# EAGLE board zx80 SD_12 (smd) build006.9(STM32) (EAGLE 9.6.2), part 1 of 2
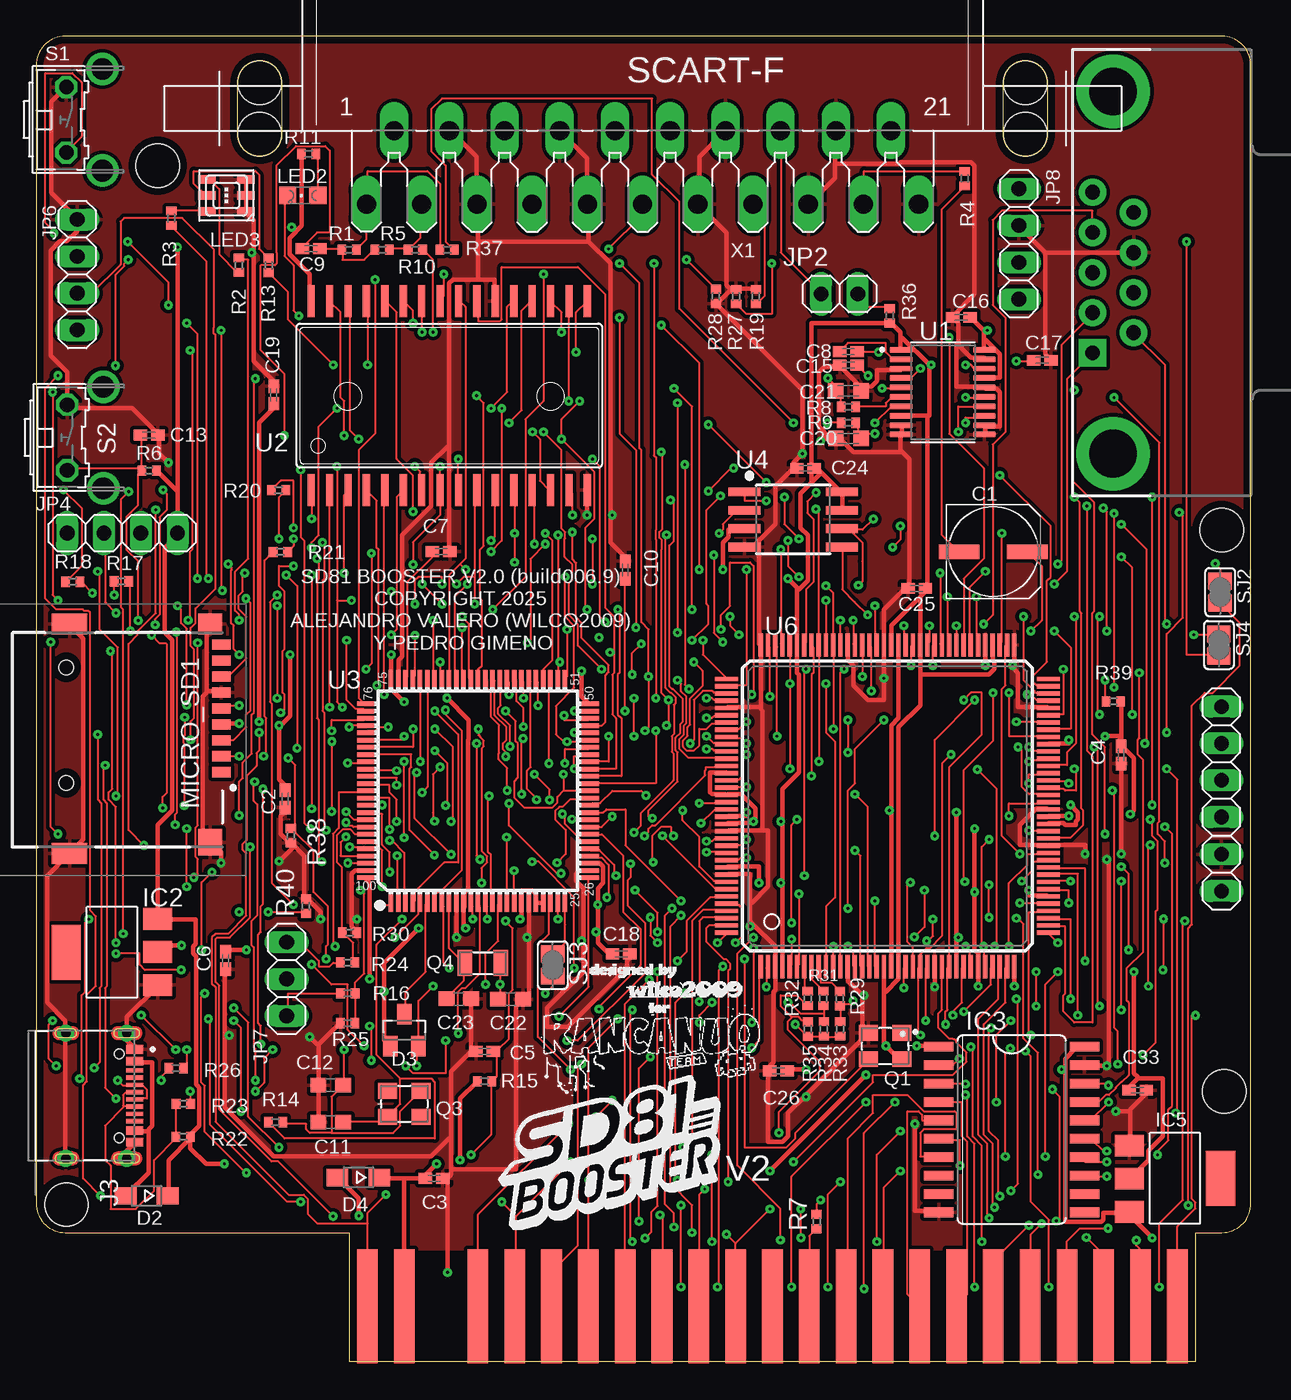
[diagram p0: board, top side]
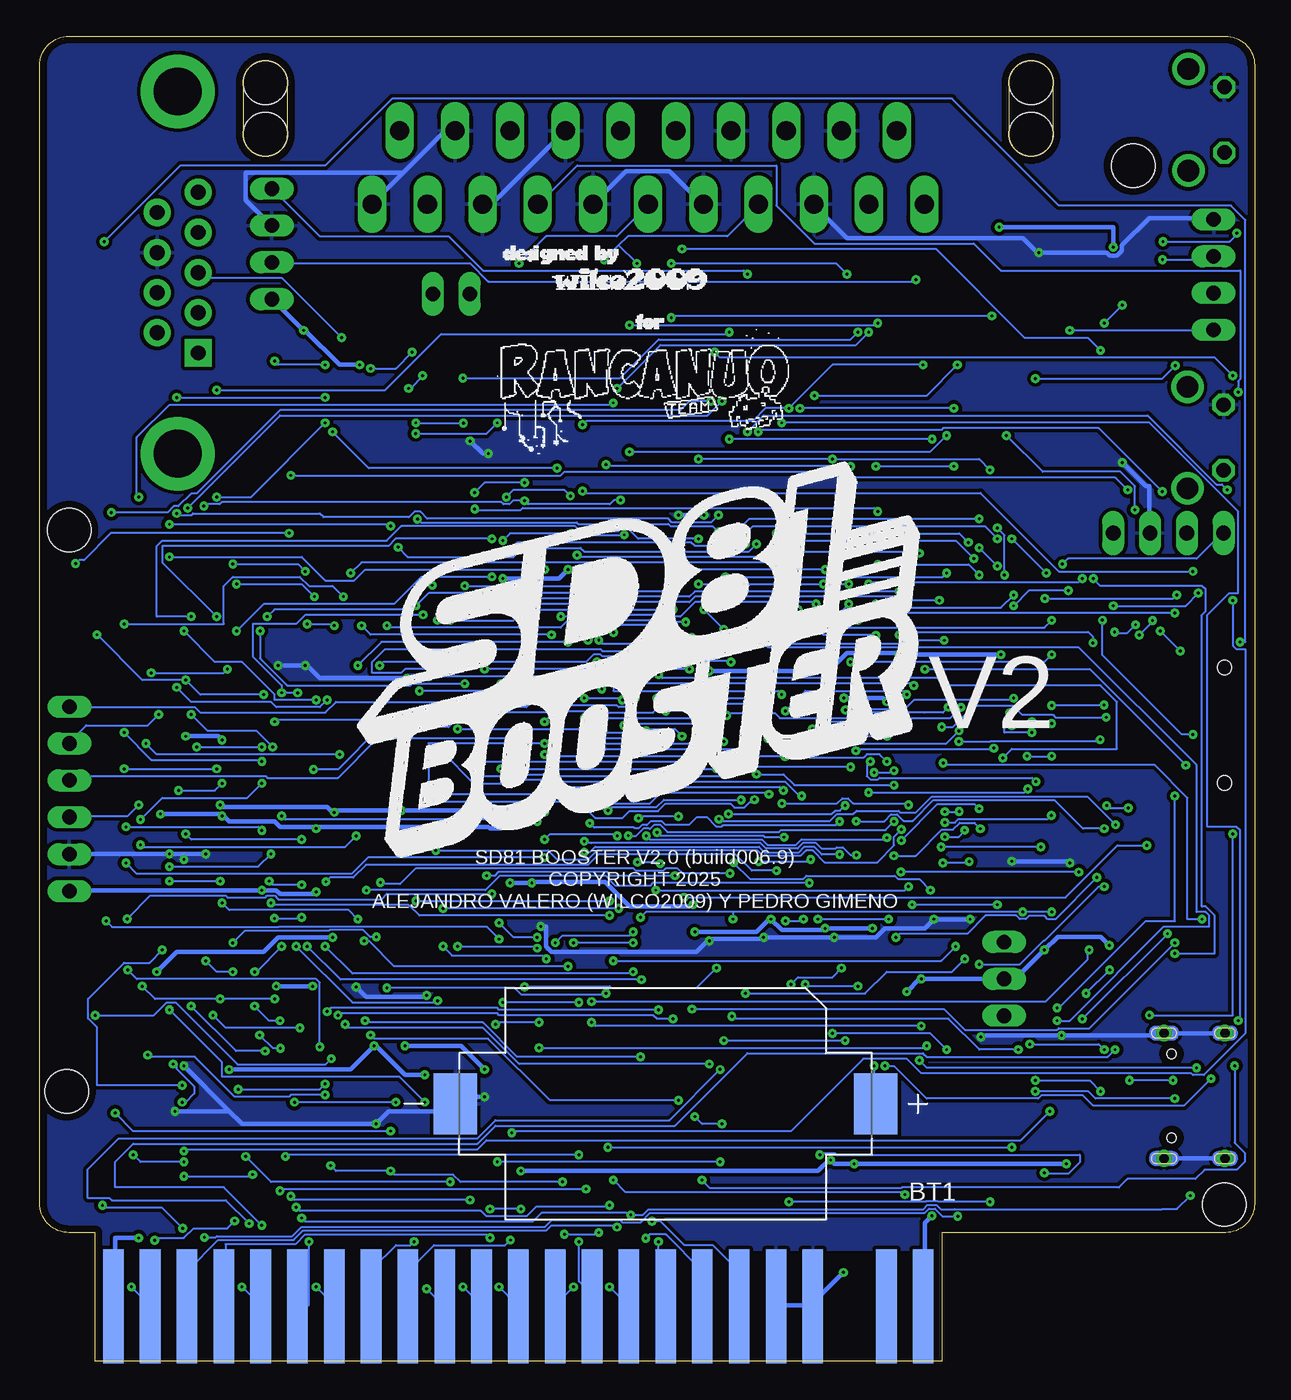
[diagram p1: board, bottom side, seen from below]

Size 83.82 x 91.44 mm. Coordinates in mm from the lower left corner, seen from the top.
Outline: 80.01,8.89 81.82,8.89 arc90 83.82,10.89 83.82,89.44 arc90 81.82,91.44 2,91.44 arc90 0,89.44 0,10.89 arc90 2,8.89 21.59,8.89 21.59,0 80.01,0 80.01,8.89
Copper layers (1*16): Top 0.035mm / dielectric 1.5mm / Bottom 0.035mm
Design rules "default *": minimum track width 5mil, minimum drill 0.2mm, track to track 5mil, track to pad 5mil, pad to pad 5mil, via to via 5mil, smd to smd 5mil, copper to edge 20mil, drill to drill 6mil, minimum pad ring 10mil, minimum via ring 8mil, stop-mask expansion 4mil, vias tented up to drill 999mil, thermal gap 10mil
Net classes: 1 VCC: width 0.3 mm; 2 3,3: width 0.3 mm
Holes 3 mm at 2.09,10.82 8.38,82.51 81.79,57.36 81.96,18.64

## Footprints (pad centres in the part's own frame; a part is rotated, then mirrored left to right if it is on the bottom)
EDGEPIN = smd 1.422 x 7.874: 1 0,0
BAT_CR2032-BS-6-1 = smd 3 x 4.2: N 14.5,0; P -14.5,0
UD-6,3X7,7_NICHICON = smd 2.8 x 1: + 2.35,0; - -2.35,0
C0402K = smd 0.925 x 0.74: 1 -0.6,0; 2 0.6,0
C0603 = smd 1.1 x 1: 1 -0.85,0; 2 0.85,0
C0603K = smd 1.05 x 1.08: 1 -0.875,0; 2 0.875,0
SOD323-W = smd 1.5 x 1.2: A 1.45,0; C -1.45,0
SOT23 = smd 1 x 1.4: 1 -0.95,-1.1; 2 0.95,-1.1; 3 0,1.1
SOT223 = smd 1.499 x 2.007: 1 -2.261,-3.15; 2 0.025,-3.15; 3 2.311,-3.15 | smd 3.81 x 2.007: 4 0,3.15
SO20W = smd 0.66 x 2.032: 1 -5.715,-5.029; 2 -4.445,-5.029; 3 -3.175,-5.029; 4 -1.905,-5.029; 5 -0.635,-5.029; 6 0.635,-5.029; 7 1.905,-5.029; 8 3.175,-5.029; 9 4.445,-5.029; 10 5.715,-5.029; 11 5.715,5.029; 12 4.445,5.029; 13 3.175,5.029; 14 1.905,5.029; 15 0.635,5.029; 16 -0.635,5.029; 17 -1.905,5.029; 18 -3.175,5.029; 19 -4.445,5.029; 20 -5.715,5.029
DB9_MALE = drill 1.016 pad 1.88 square: 1 5.54,-1.42 | drill 1.016 pad 1.88: 2 2.77,-1.42; 3 0,-1.42; 4 -2.77,-1.42; 5 -5.54,-1.42; 6 4.15,1.42; 7 1.38,1.42; 8 -1.38,1.42; 9 -4.15,1.42 | drill 3.302 pad 5.08: G1 -12.5,0; G2 12.5,0
SHOUHAN_TYPE-C_16PIN_2MD__073_ = smd 0.6 x 1.14: A1_B12 -3.2,3.675; A4_B9 -2.4,3.675; B1_A12 3.2,3.675; B4_A9 2.4,3.675 | smd 0.3 x 1.14: A5 -1.25,3.675; A6 -0.25,3.675; A7 0.25,3.675; A8 1.25,3.675; B5 1.75,3.675; B6 0.75,3.675; B7 -0.75,3.675; B8 -1.75,3.675 | drill 0.65 pad 0.95: SH1 -4.325,3.125; SH2 4.325,3.125; SH3 -4.325,-1.075; SH4 4.325,-1.075 | hole 0.65: -2.89,2.605; 2.89,2.605
1X02 = drill 1.016 long: 1 -1.27,0; 2 1.27,0
1X04 = drill 1.016 long: 1 -3.81,0; 2 -1.27,0; 3 1.27,0; 4 3.81,0
1X03 = drill 1.016 long: 1 -2.54,0; 2 0,0; 3 2.54,0
CHIPLED_0805 = smd 1.2 x 1.2: A 0,-1.05; C 0,1.05
3535-PLCC6 = smd 1.2 x 0.6: P1 1.35,-1.1; P2 1.35,0; P3 1.35,1.1; P4 -1.35,1.1; P5 -1.35,0; P6 -1.35,-1.1
TF-01A = smd 0.7 x 1.3: 1 2.23,7.174; 2 1.13,7.174; 3 0.03,7.174; 4 -1.07,7.174; 5 -2.17,7.174; 6 -3.27,7.174; 7 -4.37,7.174; 8 -5.47,7.174; CD1 -6.57,7.174 | smd 1.448 x 1.651: MP1 -7.989,6.4 | smd 1.448 x 2.438: MP2 -7.989,-3.3; MP3 7.836,-3.3 | smd 1.854 x 1.651: MP4 7.061,6.4 | hole 1: -5.004,-3.531; 2.972,-3.531
3.2X2.5_KXO-V96 = smd 1.3 x 1.1: 1 -1.15,-0.9; 2 1.15,-0.9; 3 1.15,0.9; 4 -1.15,0.9
3.2X2.5_KX-7 = smd 1.3 x 1.1: 1 -1.15,-0.9; 2 1.15,-0.9; 3 1.15,0.9; 4 -1.15,0.9
3.2X1.5 = smd 1 x 1.8: 1 -1.25,0; 2 1.25,0
R0402 = smd 0.6 x 0.7: 1 -0.5,0; 2 0.5,0
B3F-31XX = drill 1.016 octagon: 1 -2.261,-1.245; 2 2.261,-1.245 | drill 1.499 pad 2.159: 3 -3.505,1.245; 4 3.505,1.245
SJ = smd 1.168 x 1.6: 1 -0.762,0; 2 0.762,0
SOP65P640X120-20N = smd 1.57 x 0.41: 1 -2.87,2.925; 2 -2.87,2.275; 3 -2.87,1.625; 4 -2.87,0.975; 5 -2.87,0.325; 6 -2.87,-0.325; 7 -2.87,-0.975; 8 -2.87,-1.625; 9 -2.87,-2.275; 10 -2.87,-2.925; 11 2.87,-2.925; 12 2.87,-2.275; 13 2.87,-1.625; 14 2.87,-0.975; 15 2.87,-0.325; 16 2.87,0.325; 17 2.87,0.975; 18 2.87,1.625; 19 2.87,2.275; 20 2.87,2.925
SOP32-5 = smd 2.2 x 0.5: 1 -6.516,9.525; 2 -6.516,8.255; 3 -6.516,6.985; 4 -6.516,5.715; 5 -6.516,4.445; 6 -6.516,3.175; 7 -6.516,1.905; 8 -6.516,0.635; 9 -6.516,-0.635; 10 -6.516,-1.905; 11 -6.516,-3.175; 12 -6.516,-4.445; 13 -6.516,-5.715; 14 -6.516,-6.985; 15 -6.516,-8.255; 16 -6.516,-9.525; 17 6.516,-9.525; 18 6.516,-8.255; 19 6.516,-6.985; 20 6.516,-5.715; 21 6.516,-4.445; 22 6.516,-3.175; 23 6.516,-1.905; 24 6.516,-0.635; 25 6.516,0.635; 26 6.516,1.905; 27 6.516,3.175; 28 6.516,4.445; 29 6.516,5.715; 30 6.516,6.985; 31 6.516,8.255; 32 6.516,9.525
LQFP100-0.5-13.8X13.8MM = smd 1.2 x 0.32: 1 -7.75,6; 2 -7.75,5.5; 3 -7.75,5; 4 -7.75,4.5; 5 -7.75,4; 6 -7.75,3.5; 7 -7.75,3; 8 -7.75,2.5; 9 -7.75,2; 10 -7.75,1.5; 11 -7.75,1; 12 -7.75,0.5; 13 -7.75,0; 14 -7.75,-0.5; 15 -7.75,-1; 16 -7.75,-1.5; 17 -7.75,-2; 18 -7.75,-2.5; 19 -7.75,-3; 20 -7.75,-3.5; 21 -7.75,-4; 22 -7.75,-4.5; 23 -7.75,-5; 24 -7.75,-5.5; 25 -7.75,-6; 51 7.75,-6; 52 7.75,-5.5; 53 7.75,-5; 54 7.75,-4.5; 55 7.75,-4; 56 7.75,-3.5; 57 7.75,-3; 58 7.75,-2.5; 59 7.75,-2; 60 7.75,-1.5; 61 7.75,-1; 62 7.75,-0.5; 63 7.75,0; 64 7.75,0.5; 65 7.75,1; 66 7.75,1.5; 67 7.75,2; 68 7.75,2.5; 69 7.75,3; 70 7.75,3.5; 71 7.75,4; 72 7.75,4.5; 73 7.75,5; 74 7.75,5.5; 75 7.75,6 | smd 0.32 x 1.2: 26 -6,-7.75; 27 -5.5,-7.75; 28 -5,-7.75; 29 -4.5,-7.75; 30 -4,-7.75; 31 -3.5,-7.75; 32 -3,-7.75; 33 -2.5,-7.75; 34 -2,-7.75; 35 -1.5,-7.75; 36 -1,-7.75; 37 -0.5,-7.75; 38 0,-7.75; 39 0.5,-7.75; 40 1,-7.75; 41 1.5,-7.75; 42 2,-7.75; 43 2.5,-7.75; 44 3,-7.75; 45 3.5,-7.75; 46 4,-7.75; 47 4.5,-7.75; 48 5,-7.75; 49 5.5,-7.75; 50 6,-7.75; 76 6,7.75; 77 5.5,7.75; 78 5,7.75; 79 4.5,7.75; 80 4,7.75; 81 3.5,7.75; 82 3,7.75; 83 2.5,7.75; 84 2,7.75; 85 1.5,7.75; 86 1,7.75; 87 0.5,7.75; 88 0,7.75; 89 -0.5,7.75; 90 -1,7.75; 91 -1.5,7.75; 92 -2,7.75; 93 -2.5,7.75; 94 -3,7.75; 95 -3.5,7.75; 96 -4,7.75; 97 -4.5,7.75; 98 -5,7.75; 99 -5.5,7.75; 100 -6,7.75
SO08-EIAJ = smd 0.61 x 2.21: 1 -1.905,-3.378; 2 -0.635,-3.378; 3 0.635,-3.378; 4 1.905,-3.378; 5 1.905,3.353; 6 0.635,3.353; 7 -0.635,3.353; 8 -1.905,3.353
TQ144 = smd 1.6 x 0.3: P1 -11.1,8.75; P2 -11.1,8.25; P3 -11.1,7.75; P4 -11.1,7.25; P5 -11.1,6.75; P6 -11.1,6.25; P7 -11.1,5.75; P8 -11.1,5.25; P9 -11.1,4.75; P10 -11.1,4.25; P11 -11.1,3.75; P12 -11.1,3.25; P13 -11.1,2.75; P14 -11.1,2.25; P15 -11.1,1.75; P16 -11.1,1.25; P17 -11.1,0.75; P18 -11.1,0.25; P19 -11.1,-0.25; P20 -11.1,-0.75; P21 -11.1,-1.25; P22 -11.1,-1.75; P23 -11.1,-2.25; P24 -11.1,-2.75; P25 -11.1,-3.25; P26 -11.1,-3.75; P27 -11.1,-4.25; P28 -11.1,-4.75; P29 -11.1,-5.25; P30 -11.1,-5.75; P31 -11.1,-6.25; P32 -11.1,-6.75; P33 -11.1,-7.25; P34 -11.1,-7.75; P35 -11.1,-8.25; P36 -11.1,-8.75; P73 11.1,-8.75; P74 11.1,-8.25; P75 11.1,-7.75; P76 11.1,-7.25; P77 11.1,-6.75; P78 11.1,-6.25; P79 11.1,-5.75; P80 11.1,-5.25; P81 11.1,-4.75; P82 11.1,-4.25; P83 11.1,-3.75; P84 11.1,-3.25; P85 11.1,-2.75; P86 11.1,-2.25; P87 11.1,-1.75; P88 11.1,-1.25; P89 11.1,-0.75; P90 11.1,-0.25; P91 11.1,0.25; P92 11.1,0.75; P93 11.1,1.25; P94 11.1,1.75; P95 11.1,2.25; P96 11.1,2.75; P97 11.1,3.25; P98 11.1,3.75; P99 11.1,4.25; P100 11.1,4.75; P101 11.1,5.25; P102 11.1,5.75; P103 11.1,6.25; P104 11.1,6.75; P105 11.1,7.25; P106 11.1,7.75; P107 11.1,8.25; P108 11.1,8.75 | smd 0.3 x 1.6: P37 -8.75,-11.1; P38 -8.25,-11.1; P39 -7.75,-11.1; P40 -7.25,-11.1; P41 -6.75,-11.1; P42 -6.25,-11.1; P43 -5.75,-11.1; P44 -5.25,-11.1; P45 -4.75,-11.1; P46 -4.25,-11.1; P47 -3.75,-11.1; P48 -3.25,-11.1; P49 -2.75,-11.1; P50 -2.25,-11.1; P51 -1.75,-11.1; P52 -1.25,-11.1; P53 -0.75,-11.1; P54 -0.25,-11.1; P55 0.25,-11.1; P56 0.75,-11.1; P57 1.25,-11.1; P58 1.75,-11.1; P59 2.25,-11.1; P60 2.75,-11.1; P61 3.25,-11.1; P62 3.75,-11.1; P63 4.25,-11.1; P64 4.75,-11.1; P65 5.25,-11.1; P66 5.75,-11.1; P67 6.25,-11.1; P68 6.75,-11.1; P69 7.25,-11.1; P70 7.75,-11.1; P71 8.25,-11.1; P72 8.75,-11.1; P109 8.75,11.1; P110 8.25,11.1; P111 7.75,11.1; P112 7.25,11.1; P113 6.75,11.1; P114 6.25,11.1; P115 5.75,11.1; P116 5.25,11.1; P117 4.75,11.1; P118 4.25,11.1; P119 3.75,11.1; P120 3.25,11.1; P121 2.75,11.1; P122 2.25,11.1; P123 1.75,11.1; P124 1.25,11.1; P125 0.75,11.1; P126 0.25,11.1; P127 -0.25,11.1; P128 -0.75,11.1; P129 -1.25,11.1; P130 -1.75,11.1; P131 -2.25,11.1; P132 -2.75,11.1; P133 -3.25,11.1; P134 -3.75,11.1; P135 -4.25,11.1; P136 -4.75,11.1; P137 -5.25,11.1; P138 -5.75,11.1; P139 -6.25,11.1; P140 -6.75,11.1; P141 -7.25,11.1; P142 -7.75,11.1; P143 -8.25,11.1; P144 -8.75,11.1
SCART-F = drill 1.321 long: 1 19.05,5.08; 2 17.145,0; 3 15.24,5.08; 4 13.335,0; 5 11.43,5.08; 6 9.525,0; 7 7.62,5.08; 8 5.715,0; 9 3.81,5.08; 10 1.905,0; 11 0,5.08; 12 -1.905,0; 13 -3.81,5.08; 14 -5.715,0; 15 -7.62,5.08; 16 -9.525,0; 17 -11.43,5.08; 18 -13.335,0; 19 -15.24,5.08; 20 -17.145,0; 21 -19.05,5.08 | hole 3.023: 26.416,0.254; 26.416,-3.302; -26.416,0.254; -26.416,-3.302

## Placement (x,y rotation side)
1A  D7  [EDGEPIN]  22.86,3.81 0 top
1B  VCC  [EDGEPIN]  22.86,3.81 180 bottom
2A  /RAMCS  [EDGEPIN]  25.4,3.81 0 top
2B  9V  [EDGEPIN]  25.4,3.81 180 bottom
4A  D0  [EDGEPIN]  30.48,3.81 0 top
4B  GND  [EDGEPIN]  30.48,3.81 180 bottom
5A  D1  [EDGEPIN]  33.02,3.81 0 top
5B  GND  [EDGEPIN]  33.02,3.81 180 bottom
6A  D2  [EDGEPIN]  35.56,3.81 0 top
6B  /CLOCK  [EDGEPIN]  35.56,3.81 180 bottom
7A  D6  [EDGEPIN]  38.1,3.81 0 top
7B  A0  [EDGEPIN]  38.1,3.81 180 bottom
8A  D5  [EDGEPIN]  40.64,3.81 0 top
8B  A1  [EDGEPIN]  40.64,3.81 180 bottom
9A  D3  [EDGEPIN]  43.18,3.81 0 top
9B  A2  [EDGEPIN]  43.18,3.81 180 bottom
10A  D4  [EDGEPIN]  45.72,3.81 0 top
10B  A3  [EDGEPIN]  45.72,3.81 180 bottom
11A  A6  [EDGEPIN]  48.26,3.81 0 top
11B  A15  [EDGEPIN]  48.26,3.81 180 bottom
12A  /NMI  [EDGEPIN]  50.8,3.81 0 top
12B  A14  [EDGEPIN]  50.8,3.81 180 bottom
13A  /HALT  [EDGEPIN]  53.34,3.81 0 top
13B  A13  [EDGEPIN]  53.34,3.81 180 bottom
14A  /MREQ  [EDGEPIN]  55.88,3.81 0 top
14B  A12  [EDGEPIN]  55.88,3.81 180 bottom
15A  /IORQ  [EDGEPIN]  58.42,3.81 0 top
15B  A11  [EDGEPIN]  58.42,3.81 180 bottom
16A  /RD  [EDGEPIN]  60.96,3.81 0 top
16B  A10  [EDGEPIN]  60.96,3.81 180 bottom
17A  /WR  [EDGEPIN]  63.5,3.81 0 top
17B  A9  [EDGEPIN]  63.5,3.81 180 bottom
18A  /BUSAK  [EDGEPIN]  66.04,3.81 0 top
18B  A8  [EDGEPIN]  66.04,3.81 180 bottom
19A  /WAIT  [EDGEPIN]  68.58,3.81 0 top
19B  A7  [EDGEPIN]  68.58,3.81 180 bottom
20A  /BUSRQ  [EDGEPIN]  71.12,3.81 0 top
20B  A6  [EDGEPIN]  71.12,3.81 180 bottom
21A  /RESET  [EDGEPIN]  73.66,3.81 0 top
21B  A5  [EDGEPIN]  73.66,3.81 180 bottom
22A  /M1  [EDGEPIN]  76.2,3.81 0 top
22B  A4  [EDGEPIN]  76.2,3.81 180 bottom
23A  /RFSH  [EDGEPIN]  78.74,3.81 0 top
23B  /ROMCS  [EDGEPIN]  78.74,3.81 180 bottom
BT1  CR2032-BS-6-1  [BAT_CR2032-BS-6-1]  40.64,17.78 180 bottom
C1  220uF  [UD-6,3X7,7_NICHICON]  66.04,55.88 0 top
C2  100nF  [C0402K]  17.17,38.81 270 top
C3  10uF  [C0402K]  27.45,12.63 0 top
C4  100nF  [C0402K]  74.85,41.85 90 top
C5  10uf  [C0402K]  30.94,21.39 0 top
C6  10uF  [C0402K]  13.07,27.66 270 top
C7  10uF  [C0402K]  27.94,55.88 0 top
C8  2.2uF  [C0402K]  56.04,69.67 180 top
C9  10uF  [C0402K]  18.96,76.79 180 top
C10  10uF  [C0402K]  40.64,54.61 90 top
C11  22pF  [C0603]  20.32,16.51 0 top
C12  22pF  [C0603]  20.32,19.05 0 top
C13  10uf  [C0402K]  7.79,63.92 180 top
C15  2.2uF  [C0402K]  56.04,68.74 0 top
C16  100nF  [C0402K]  63.83,72.05 0 top
C17  100nF  [C0402K]  69.42,69.08 180 top
C18  100nF  [C0402K]  40.37,28.11 0 top
C19  100nF  [C0402K]  16.39,66.69 90 top
C20  2.2nf  [C0603K]  56.05,63.68 0 top
C21  2.2nf  [C0603K]  56.04,66.97 180 top
C22  22pF  [C0603]  32.73,25 180 top
C23  22pF  [C0603]  29.16,25.02 180 top
C24  0.1uF  [C0402K]  53.09,61.63 180 top
C25  0.1uF  [C0402K]  60.76,53.34 180 top
C26  100nF  [C0402K]  51.22,20.05 180 top
C33  10uF  [C0402K]  76,18.71 0 top
D2  1n5819  [SOD323-W]  7.62,11.43 180 top
D3  BAT54C  [SOT23]  25.4,22.86 0 top
D4  1n5819  [SOD323-W]  22.23,12.7 180 top
IC2  REG1117  [SOT223]  5.23,28.23 90 top
IC3  74LS245DW  [SO20W]  67.3,16 270 top
IC5  1.2V  [SOT223]  78.57,12.64 270 top
J2  JOYSTICK  [DB9_MALE]  74.31,75.13 270 top
J3  TYPE-C_16PIN_2MD__073_  [SHOUHAN_TYPE-C_16PIN_2MD__073_]  3.12,18.33 270 top
JP2  RGB_ON  [1X02]  55.43,73.67 0 top
JP3  JTAG  [1X04]  81.78,41.37 90 top
JP4  SERIAL  [1X04]  5.94,57.16 180 top
JP5  VREF  [1X02]  81.78,33.73 90 top
JP6  PS2  [1X04]  2.83,74.98 270 top
JP7  BOOT  [1X03]  17.28,26.39 270 top
JP8  ST-LINK-V2  [1X04]  67.81,77.11 270 top
LED2  SD  [CHIPLED_0805]  18.4,80.45 90 top
LED3  STATUS  [3535-PLCC6]  13.13,80.45 0 top
MICRO_SD1  TF-01A  [TF-01A]  5.6,42.89 270 top
Q1  100MHz  [3.2X2.5_KXO-V96]  58.58,21.76 180 top
Q3  8MHz  [3.2X2.5_KX-7]  25.4,17.78 0 top
Q4  32767Hz  [3.2X1.5]  30.82,27.49 0 top
R1  1K  [R0402]  21.58,76.7 180 top
R2  150  [R0402]  13.98,75.64 270 top
R3  68  [R0402]  9.33,78.89 90 top
R4  75R  [R0402]  64.07,81.62 270 top
R5  1K  [R0402]  23.87,76.7 180 top
R6  10K  [R0402]  7.79,61.46 0 top
R7  33  [R0402]  53.84,9.65 90 top
R8  470  [R0402]  56.04,65.86 0 top
R9  470  [R0402]  56.04,64.76 180 top
R10  1K  [R0402]  26.16,76.7 180 top
R11  680  [R0402]  18.8,83.32 0 top
R13  150  [R0402]  16.05,75.63 90 top
R14  1M  [R0402]  16.51,16.51 0 top
R15  10K  [R0402]  30.94,19.34 180 top
R16  510  [R0402]  21.5,25.4 0 top
R17  3k3  [R0402]  5.87,53.83 180 top
R18  3k3  [R0402]  2.52,53.8 0 top
R19  130  [R0402]  49.66,73.47 90 top
R20  3k3  [R0402]  16.73,60.12 0 top
R21  3k3  [R0402]  16.85,55.86 180 top
R22  1K5  [R0402]  10.14,15.5 0 top
R23  22R  [R0402]  10.16,17.78 0 top
R24  510  [R0402]  21.49,27.52 180 top
R25  10K  [R0402]  21.49,23.34 0 top
R26  22R  [R0402]  9.65,20.24 0 top
R27  130  [R0402]  48.3,73.47 90 top
R28  130  [R0402]  46.9,73.48 270 top
R29  270  [R0402]  55.45,25.03 270 top
R30  10K  [R0402]  21.63,29.59 180 top
R31  270  [R0402]  54.32,25.04 270 top
R32  270  [R0402]  53.23,25.04 270 top
R33  470  [R0402]  55.47,22.94 90 top
R34  470  [R0402]  54.34,22.94 90 top
R35  470  [R0402]  53.24,22.92 90 top
R36  100R  [R0402]  58.89,72.15 270 top
R37  1K  [R0402]  28.36,76.7 180 top
R38  1K  [R0402]  17.57,36.28 270 top
R39  4K7  [R0402]  74.33,45.55 180 top
R40  1K  [R0402]  18.62,31.41 90 top
S1  RESET  [B3F-31XX]  3.32,85.67 270 top
S2  QSILVA  [B3F-31XX]  3.38,63.75 270 top
SJ2  [SJ]  81.69,53.08 270 top
SJ3  [SJ]  35.64,27.35 270 top
SJ4  [SJ]  81.61,49.44 270 top
U1  PCM5100PW  [SOP65P640X120-20N]  62.56,66.88 0 top
U2  AS6C4008  [SOP32-5]  28.5,66.65 90 top
U3  MCU-STM32F407VET6  [LQFP100-0.5-13.8X13.8MM]  30.48,39.37 90 top
U4  W25Q128JVSIQ  [SO08-EIAJ]  52.23,58.1 270 top
U6  XC6SLX9-2TQG144C  [TQ144]  58.74,38.34 90 top
X1  SCART-F  [SCART-F]  41.84,84.93 180 top

## Library data of the parts
1A 1B 2A 2B 4A 4B 5A 5B 6A 6B 7A 7B 8A 8B 9A 9B 10A 10B 11A 11B 12A 12B 13A 13B 14A 14B 15A 15B 16A 16B 17A 17B 18A 18B 19A 19B 20A 20B 21A 21B 22A 22B 23A 23B = wirepad
BT1 = CR2032-BS-6-1; AVAILABILITY: Not in stock; CHECK_PRICES: https://www.snapeda.com/parts/CR2032-BS-6-1/Shenzhen+Huacan+Tianlu+Electronics+Co.%252C+Ltd./view-part/?ref=eda; DESCRIPTION: Battery base CR2032 SMD Battery Connectors ROHS; MF: Shenzhen Q&J Electronics Co. Ltd; MP: CR2032-BS-6-1; PACKAGE: Package; PRICE: None; SNAPEDA_LINK: https://www.snapeda.com/parts/CR2032-BS-6-1/Shenzhen+Huacan+Tianlu+Electronics+Co.%252C+Ltd./view-part/?ref=snap
C1-C13 C15-C26 C33 = rcl; SPICEPREFIX: C
D2-D4 = diode
IC2 IC5 = burr-brown; MPN: REG1117; OC_FARNELL: 1097566; OC_NEWARK: 14P6981
IC3 = 74xx-eu
J2 = SparkFun-Connectors; PROD_ID: CONN-09904
J3 = TYPE-C_16PIN_2MD__073_; AVAILABILITY: Not in stock; CHECK_PRICES: https://www.snapeda.com/parts/TYPE-C%2016PIN%202MD%20(073)/Shouhan/view-part/?ref=eda; DESCRIPTION: DC-5V 5A Type C USB; MF: Shouhan; MP: TYPE-C 16PIN 2MD (073); PACKAGE: Package; PRICE: None; SNAPEDA_LINK: https://www.snapeda.com/parts/TYPE-C%2016PIN%202MD%20(073)/Shouhan/view-part/?ref=snap
JP2-JP8 = pinhead
LED2 LED3 = led
MICRO_SD1 = TF-01A; AVAILABILITY: Not in stock; CHECK_PRICES: https://www.snapeda.com/parts/TF-01A/HRO+Electronics+Co.%252C+Ltd./view-part/?ref=eda; DESCRIPTION: Standard Card Edge Connectors; MF: HRO Electronics Co., Ltd.; MP: TF-01A; PACKAGE: Package; PRICE: None; SNAPEDA_LINK: https://www.snapeda.com/parts/TF-01A/HRO+Electronics+Co.%252C+Ltd./view-part/?ref=snap
Q1 Q3 Q4 = crystal-geyer_V1_0
R1-R11 R13-R40 = rcl; SPICEPREFIX: R
S1 S2 = switch-omron; MPN: B3F-3100; OC_FARNELL: 959704; OC_NEWARK: 36M3582
SJ2-SJ4 = jumper
U1 = PCM5100PW; AVAILABILITY: In Stock; CHECK_PRICES: https://www.snapeda.com/parts/PCM5100PW/Texas+Instruments/view-part/?ref=eda; DESCRIPTION: 100dB Stereo DAC with 2VRMS output and Integrated Audio PLL 20-TSSOP -25 to 85; MF: Texas Instruments; MP: PCM5100PW; PACKAGE: TSSOP-20 Texas Instruments; PRICE: None; SNAPEDA_LINK: https://www.snapeda.com/parts/PCM5100PW/Texas+Instruments/view-part/?ref=snap
U2 = AS6C4008-55SIN
U3 = MCU-STM32F407VET6_LQFP100_; AVAILABILITY: In Stock; CHECK_PRICES: https://www.snapeda.com/parts/STM32F407VET6/STMicroelectronics/view-part/?ref=eda; DESCRIPTION: ARM® Cortex®-M4 STM32F4 Microcontroller IC 32-Bit Single-Core 168MHz 512KB (512K x 8) FLASH 100-LQFP (14x14); MF: STMicroelectronics; MP: STM32F407VET6; PACKAGE: LQFP-100 STMicroelectronics; PRICE: None; SNAPEDA_LINK: https://www.snapeda.com/parts/STM32F407VET6/STMicroelectronics/view-part/?ref=snap
U4 = SparkFun-IC-Memory; PROD_ID: IC-09109; VALUE: 25F32006WSOI
U6 = XC6SLX9-2TQG144C; AVAILABILITY: In Stock; CHECK_PRICES: https://www.snapeda.com/parts/XC6SLX9-2TQG144C/Xilinx/view-part/?ref=eda; DESCRIPTION: Spartan®-6 LX Field Programmable Gate Array (FPGA) IC 102 589824 9152 144-LQFP; MF: Xilinx Inc.; MP: XC6SLX9-2TQG144C; PACKAGE: TQFP-144 Xilinx; PRICE: None; SNAPEDA_LINK: https://www.snapeda.com/parts/XC6SLX9-2TQG144C/Xilinx/view-part/?ref=snap
X1 = con-hirschmann; OC_FARNELL: unknown; OC_NEWARK: unknown

## Nets
1V2 [VCC]: C33.1 IC5.2 U6.P19 U6.P28 U6.P52 U6.P89 U6.P128
3V3 [VCC]: C2.1 C4.2 C6.1 C16.2 C18.1 C19.1 C24.1 C25.1 C26.1 D3.1 IC2.2 JP5.1 JP7.2 JP8.4 MICRO_SD1.4 Q1.4 R36.2 R39.1 U1.1 U1.8 U1.17 U1.20 U3.11 U3.19 U3.21 U3.22 U3.28 U3.50 U3.75 U3.100 U4.3 U4.7 U4.8 U6.P4 U6.P18 U6.P20 U6.P31 U6.P36 U6.P42 U6.P53 U6.P63 U6.P76 U6.P86 U6.P90 U6.P103 U6.P122 U6.P125 U6.P129 U6.P135
9V [VCC]: 2B.1
!RESET: C5.2 R15.1 S1.2 U3.14
/BUSAK: 18A.1 SJ4.2
/BUSRQ: 20A.1 SJ2.2
/BUSRQ': SJ2.1 U6.P75
/CLOCK: 6B.1 U6.P24
/HALT: R7.2 U6.P45
/HALT': 13A.1 R7.1
/IORQ: IC3.14 U6.P51
/IORQ_5: 15A.1 IC3.6 U6.P143
/M1: IC3.17 U6.P67
/M1_5: 22A.1 IC3.3
/MEM_OE: U2.24 U3.67 U6.P92
/MREQ: IC3.13 U6.P47
/MREQ_5: 14A.1 IC3.7
/NMI: 12A.1
/OE_OL: U3.77 U6.P12
/RD: IC3.15 U6.P105
/RD_5: 16A.1 IC3.5
/RESET: 21A.1 U3.96
/RESET_FPGA: U3.95 U6.P140
/RFSH: IC3.18 U6.P74
/RFSH_5: 23A.1 IC3.2
/WAIT: 19A.1 U3.23
/WR: IC3.16 U6.P58
/WR': U2.29 U3.26 U6.P102
/WR_5: 17A.1 IC3.4
A0: 7B.1 U6.P30
A0': U2.12 U3.97 U6.P83
A1: 8B.1 U6.P33
A1': U2.11 U3.98 U6.P84
A2: 9B.1 U6.P35
A2': U2.10 U3.1 U6.P85
A3: 10B.1 U6.P40
A3': U2.9 U3.2 U6.P88
A4: 22B.1 U6.P5
A4': U2.8 U3.3 U6.P93
A5: 21B.1 U6.P66
A5': U2.7 U3.4 U6.P95
A6: 11A.1 20B.1 U6.P41
A6': U2.6 U3.5 U6.P99
A7: 19B.1 U6.P62
A7': U2.5 U3.38 U6.P101
A8: 18B.1 U6.P6
A8': U2.27 U3.39 U6.P98
A9: 17B.1 U6.P59
A9': U2.26 U3.40 U6.P97
A10: 16B.1 U6.P57
A10': U2.23 U3.41 U6.P87
A11: 15B.1 U6.P55
A11': U2.25 U3.42 U6.P94
A12: 14B.1 U6.P48
A12': U2.4 U3.43 U6.P104
A13: 13B.1 U6.P46
A13': U2.28 U3.44 U6.P100
A14: 12B.1 U6.P44
A14': U2.3 U3.45 U6.P111
A15: 11B.1 U6.P43
A15': U2.31 U3.46 U6.P112
A16': U2.2 U3.48 U6.P114
A17': U2.30 U3.51 U6.P61
A18': U2.1 U3.52 U6.P115
B0: U3.55 U6.P116
B1: U3.56 U6.P117
B2: U3.57 U6.P118
B3: U3.58 U6.P119
B4: U3.59 U6.P120
B5: U3.60 U6.P121
B6: U3.61 U6.P123
B7: U3.62 U6.P124
BAT: BT1.P D3.2 U3.16
BCK: U1.13 U6.P50
BOOT0: R24.1 R30.2 U3.94
BRIGHT: R33.1 R34.1 R35.1 U6.P11
CC1: J3.A5
CC2: J3.B5
CFG_CLK: U3.35 U6.P17
CFG_DATA: U3.89 U6.P15
CFG_RESET: U3.36 U6.P16
CLK100: Q1.3 U6.P14
COMPOSITE: R4.1 X1.19
CS_LLS: MICRO_SD1.2 R21.2
CSYNC: C1.+ U6.P10
CTRL_CLK: U3.90 U6.P22
D0: 4A.1 U2.13 U6.P23
D1: 5A.1 U2.14 U6.P26
D2: 6A.1 U2.15 U6.P27
D3: 9A.1 U2.17 U6.P34
D4: 10A.1 U2.18 U6.P39
D5: 8A.1 U2.19 U6.P32
D6: 7A.1 U2.20 U6.P29
D7: 1A.1 U2.21 U6.P21
DEBUG_CLOCK: R40.1 U3.24 U6.P144
DEBUG_RDY: SJ3.1 U3.25
DI_LLS: MICRO_SD1.3 R17.2
DIN: U1.14 U6.P141
DOWN: J2.2 U6.P79
FIRE: J2.6 U6.P82
FLASH_CS: U3.33 U4.1 U6.P38
FLASH_MISO: U3.17 U4.2 U6.P65
FLASH_MOSI: U3.18 U4.5 U6.P64
FLASH_SCLK: U3.47 U4.6 U6.P70
FPGA_DONE: U3.34 U6.P71
FPGAPROG: U3.80 U6.P37
GET_CTRL_REG: U3.66 U6.P56
GET_DATA_REG: U3.78 U6.P2
GND [VCC]: 4B.1 5B.1 BT1.N C2.2 C3.2 C4.1 C5.1 C6.2 C7.2 C10.2 C11.1 C12.1 C13.1 C15.1 C16.1 C17.1 C18.2 C19.2 C20.1 C21.1 C22.1 C23.1 C24.2 C25.2 C26.2 C33.2 IC2.1 IC3.10 IC3.19 IC5.1 J2.8 J3.A1_B12 J3.B1_A12 J3.SH1 J3.SH2 J3.SH3 J3.SH4 JP4.2 JP5.2 JP6.1 JP8.2 LED3.P1 LED3.P2 LED3.P3 MICRO_SD1.6 MICRO_SD1.MP1 MICRO_SD1.MP2 MICRO_SD1.MP3 MICRO_SD1.MP4 Q1.2 R19.2 R25.1 R27.2 R28.2 R30.1 R38.2 R40.2 S1.1 S2.1 U1.3 U1.9 U1.10 U1.11 U1.12 U1.16 U1.19 U2.16 U2.22 U3.10 U3.20 U3.27 U3.74 U3.99 U4.4 U6.P3 U6.P13 U6.P25 U6.P49 U6.P54 U6.P68 U6.P73 U6.P77 U6.P91 U6.P96 U6.P108 U6.P113 U6.P130 U6.P136 X1.4 X1.5 X1.8 X1.9 X1.13 X1.14 X1.17 X1.18 X1.21
LEDB: R3.1 U3.64
LEDG: R13.1 U3.63
LEDR: R2.1 U3.65
LEFT: J2.3 U6.P80
LRCK: U1.15 U6.P134
MISO: R20.1 U3.31
MOSI: R17.1 U3.32
N$1: R39.2 SJ4.1 U6.P69
N$2: MICRO_SD1.7 R20.2
N$3 [VCC]: 1B.1 D4.A
N$4: J3.A6 J3.B6 R22.1 R23.1
N$5: D3.3 U3.6
N$6: C1.- R4.2
N$7: C13.2 R6.1 S2.2 U3.79
N$8: R5.1 R10.2 X1.3
N$9: C9.1 R1.2 R5.2
N$11: C7.1 U3.73
N$12: J3.A7 J3.B7 R26.1
N$13: C21.2 R8.1 R10.1
N$15: LED2.A R11.2
N$16: C10.1 U3.49
N$17: JP2.1 X1.16
N$18: C11.2 Q3.1 R14.1 U3.12
N$19: C12.2 Q3.3 R14.2 U3.13
N$20: JP7.3 R16.1
N$21: JP7.1 R24.2
N$22: C22.2 Q4.2 U3.8
N$23: C23.2 Q4.1 U3.9
N$25: C20.2 R9.1 R37.1
N$26: LED3.P4 R2.2
N$27: LED3.P6 R3.2
N$28: LED3.P5 R13.2
N$30: JP2.2 R36.1
N$31: R38.1 SJ3.2 U6.P60
N$32: R8.2 U1.6
N$33: R9.2 U1.7
N$34: C8.2 U1.2
N$35: C8.1 U1.4
N$36: C15.2 U1.5
N$38: C17.2 U1.18
N$40: R1.1 R37.2 X1.1
O0: U3.81 U6.P126
O1: U3.82 U6.P127
O2: U3.83 U6.P131
O3: U3.84 U6.P132
O4: U3.85 U6.P133
O5: U3.86 U6.P137
O6: U3.87 U6.P138
O7: U3.88 U6.P139
PA11/USB_DN: R26.2 U3.70
PA12/USB_DP: R23.2 U3.71
PA13/JTMS/SWDIO: JP8.1 U3.72
PA14/JTCK/SWCLK: JP8.3 U3.76
PB2/BOOT1: R16.2 R25.2 U3.37
RIGHT: J2.4 U6.P81
RST_CTRL_REG: U3.53 U6.P1
RST_DATA_REG: U3.91 U6.P142
SCK_LLS: MICRO_SD1.5 R18.2
SCL: JP6.3 U3.92
SCLK: R18.1 U3.30
SD_LED: LED2.C U3.15
SDA: JP6.2 U3.93
SOUND: C9.2 U3.29
SPARE1: JP6.4 U3.7
SS_SD: R21.1 U3.54
TCK: JP3.1 U6.P109
TDI: JP3.3 U6.P110
TDO: JP3.2 U6.P106
TMS: JP3.4 U6.P107
UART_RX: JP4.3 U3.69
UART_TX: JP4.4 U3.68
UP: J2.1 U6.P78
V_BLUE: R29.1 U6.P9
V_BLUE': R28.1 R29.2 R33.2 X1.7
V_GREEN: R31.1 U6.P8
V_GREEN': R27.1 R31.2 R34.2 X1.11
V_RED: R32.1 U6.P7
V_RED': R19.1 R32.2 R35.2 X1.15
VCC [VCC]: 2A.1 23B.1 C3.1 D2.C D4.C IC2.3 IC3.1 IC3.20 IC5.3 JP4.1 R6.2 R11.1 R15.2 R22.2 U2.32
VCC_USB [VCC]: D2.A J3.A4_B9 J3.B4_A9

## Tracks (layer width: path | path; a pad name or v marks a point on that pad's centre or on a via)
1V2  (via drill 0.2)
  Top 0.3: 76,19.52 75.25,18.77 C33.1 | 76,19.52 77.75,19.52 77.75,15.52 76.75,14.52 76.75,13.89 75.5,12.64 IC5.2 | 59,38.02 59,43.89 59.5,44.39 59.5,49.39 U6.P89 | 59,38.02 59,27.27 U6.P19 | v49,37.89 49,37.64 47.75,37.64 U6.P128 | v58.88,38.02 59,38.02 | v63.5,37.89 63.5,29.27 | 63.5,29.27 63.5,27.27 U6.P28 | v71.38,38.39 71.88,37.89 71.88,37.39 71.75,37.27 71.75,37.02 71,37.02 70.88,37.14 69.88,37.14 U6.P52 | v75.75,26.89 75.75,19.89 76,19.64 76,19.52 | v63.62,29.27 63.5,29.27
  Bottom 0.3: v49,37.89 49.12,38.02 v58.88,38.02 63.38,38.02 v63.5,37.89 63.62,37.89 64,38.27 71.25,38.27 v71.38,38.39 | v75.75,26.89 74.38,28.27 68.38,28.27 67.38,29.27 v63.62,29.27
3V3  (via drill 0.2)
  Top 0.3: v53.12,20.14 52.12,20.14 C26.1 | Q1.4 59.62,20.77 v58.62,21.77 58.5,21.77 58.5,25.52 | 58.5,25.52 58.5,27.14 U6.P18 | 58.5,25.52 58.62,25.52 59.5,26.39 59.5,27.14 U6.P20 59.5,27.39 59.5,43.77 61,45.27 61,47.39 | 65.38,71.14 64.5,72.02 C16.2 | 65.38,70.52 65.38,69.89 U1.20 | 65.38,70.52 65.38,71.14 | U1.17 65.5,67.89 66.5,67.89 66.5,69.52 65.5,70.52 65.38,70.52 | v65.62,71.14 65.38,71.14 | 59.62,70.64 59.62,69.89 U1.1 | 59.62,70.64 59.62,71.02 59,71.64 R36.2 58.75,71.64 53.5,71.64 53.5,60.77 53.56,60.7 | 61.5,65.27 61.62,65.27 61.62,68.77 | 61.5,65.27 59.75,65.27 U1.8 | 61.62,68.77 59.75,70.64 59.62,70.64 | 61,52.64 61,49.52 U6.P86 61,49.39 61,47.39 | 61,52.64 61,52.77 61.5,53.27 C25.1 61.5,53.39 61.5,65.27 | U6.P90 59,49.52 59,50.77 60.88,52.64 61,52.64 | 61,47.39 65.75,47.39 66.12,47.77 66.12,48.27 66,48.39 66,49.39 U6.P76 | v61.75,68.77 61.62,68.77 | v14,44.02 12.88,44.02 MICRO_SD1.4 | C2.1 17.12,39.77 16.75,40.14 v16.75,43.89 16.88,43.89 17.51,44.52 v17.51,48.77 | v15.38,44.14 15.38,64.77 16.38,65.77 C19.1 | v24.5,48.77 24.5,47.14 U3.75 24.5,47.02 24.5,46.39 v25.38,45.52 | v37.62,47.64 37.62,45.89 38.12,45.39 U3.50 | U3.22 34.88,31.64 34.5,31.64 U3.21 34.5,31.77 34.5,32.27 34.25,32.52 33.5,32.52 33.5,31.77 U3.19 33.5,31.52 33.5,30.64 v33.38,30.52 | 29.5,31.32 29.5,30.02 v29.62,29.89 | 29.5,31.32 29.5,31.52 U3.11 | 38.75,29.64 v38.75,31.52 38.75,32.64 39.12,33.02 39.12,34.14 38.88,34.39 38.25,34.39 U3.28 | 38.75,29.64 38.75,28.89 39.5,28.14 C18.1 | v38.62,29.64 38.75,29.64 | v14.5,28.39 13.12,28.39 C6.1 | v23,26.39 23,33.02 22.75,33.27 U3.100 | D3.1 24.38,21.77 24,22.14 v24,25.52 24,27.52 v26.38,29.89
  Top 0.3: v10.02,28.71 8.83,28.71 IC2.2 | v67.5,25.89 67.5,27.14 U6.P36 | v65,25.89 65,27.14 U6.P31 65,27.27 65,28.14 64.75,28.39 v64.75,32.39 v64.75,36.77 | v68.5,32.52 68.5,32.14 69.75,32.14 U6.P42 | R39.1 74.88,45.52 74.88,42.77 C4.2 | v71.25,37.64 69.88,37.64 U6.P53 | v75.5,37.77 75.75,38.02 75.75,41.64 74.88,42.52 74.88,42.64 C4.2 | v71.25,42.89 71.25,42.64 69.88,42.64 U6.P63 | v73.75,43.14 74.75,43.14 C4.2 | U4.7 55.62,58.77 55.62,59.89 U4.8 55.5,60.02 54,61.52 C24.1 54.12,61.27 53.56,60.7 | 49.5,37.14 49.62,37.14 49.62,38.14 48.62,39.14 47.75,39.14 U6.P125 47.5,39.14 46.62,39.14 46.5,39.27 46.5,40.64 47.62,40.64 U6.P122 | 49.5,37.14 47.75,37.14 U6.P129 | 51.5,37.27 51.5,39.52 52.62,40.64 52.62,47.39 52.5,47.52 52.5,49.39 U6.P103 52.5,49.52 52.5,53.27 | 51.5,37.27 51.5,33.02 | 51.5,33.02 51.5,27.27 U6.P4 | v49.88,33.02 49.88,34.14 47.75,34.14 U6.P135 | v51.38,33.02 51.5,33.02 | v47.38,54.64 47.38,56.52 47.75,56.89 47.75,57.39 48.75,57.39 U4.3 | v51.88,54.02 52.5,53.39 52.5,53.27 | v49.5,37.27 49.5,37.14 | v51.38,37.27 51.5,37.27 | 53.56,60.7 52.75,59.89 52.75,57.52 53.25,57.02 53.25,53.89 52.62,53.27 52.5,53.27 | v28.34,45.77 29.84,44.27 29.84,42.92 29.8,42.88 29.8,32.59 29.54,32.34 29.54,31.37 29.5,31.32
  Bottom 0.3: v53.12,20.14 54.75,21.77 v58.62,21.77 | JP8.4 67.75,73.27 v65.62,71.14 65.5,71.14 63.12,68.77 v61.75,68.77 | v16.75,43.89 16.62,44.02 15.38,44.02 | v14,44.02 15.38,44.02 | v15.38,44.14 15.38,44.02 | v17.51,48.77 v24.5,48.77 24.5,48.89 28.12,48.89 29.38,47.64 v37.62,47.64 | v38.62,29.64 34.38,29.64 33.5,30.52 v33.38,30.52 32.62,29.77 29.75,29.77 v29.62,29.89 v26.38,29.89 | v24,25.52 23.12,26.39 v23,26.39 17.38,26.39 JP7.2 17.25,26.39 16.5,26.39 v14.5,28.39 13.59,29.3 10.62,29.3 v10.02,28.71 | v64.75,32.39 64.88,32.27 67.25,32.27 67.5,32.52 v68.5,32.52 81.75,32.52 JP5.1 | v65,25.89 v67.5,25.89 | v75.5,37.77 71.38,37.77 v71.25,37.64 71.12,37.64 70.75,37.27 67.62,37.27 67.25,36.89 64.75,36.89 | v71.25,42.89 71.5,43.14 v73.75,43.14 | v51.38,33.02 v49.88,33.02 49.81,33.08 44.82,33.08 43.12,31.39 38.88,31.39 v38.75,31.52 | v47.38,54.64 48,54.02 v51.88,54.02 | v49.5,37.27 v51.38,37.27 51.5,37.27 52,36.77 52.75,36.77 52.88,36.89 64.75,36.89 | v64.75,36.77 64.75,36.89 | v28.34,45.77 25.63,45.77 v25.38,45.52
!RESET  (via drill 0.2)
  Top 0.127: v31.12,30.52 31.12,31.39 31,31.52 U3.14 | v32.38,30.39 32.88,29.89 32.88,25.64 32.62,25.39 32.62,22.27 31.88,21.52 C5.2 31.75,21.39 31.75,19.64 31.5,19.39 R15.1 31.38,19.27 31.38,15.64 v30,14.27 | v6.31,77.27 9.12,74.45 v9.12,72.89 | v10.38,71.64 11.12,70.89 v11.12,54.02 | v5.5,28.14 7.12,28.14 7.12,27.39 7.5,27.02 v10,27.02 | v11.62,25.39 11.38,25.14 11.38,19.27 11.62,19.02 11.62,15.83 14.44,13.02 v14.5,13.02 | S1.2 2.12,83.52 3.12,84.52 3.12,88.27 2.5,88.89 0.62,88.89 0.62,78.57 1.23,77.97 v1.23,77.84
  Bottom 0.127: v31.12,30.52 31.25,30.39 v32.38,30.39 | v6.31,77.27 1.72,77.27 1.23,77.76 v1.23,77.84 | v10.38,71.64 v9.12,72.89 | v11.12,54.02 10.62,53.52 3.62,53.52 3.38,53.27 3.38,51.77 3.62,51.52 3.62,31.39 3.38,31.39 2.75,30.77 2.75,28.14 v5.5,28.14 | v11.62,25.39 v10,27.02 | v14.5,13.02 14.46,12.97 12.82,12.97 12.06,13.73 12.06,14.27 28.88,14.27 29,14.39 29.88,14.39 v30,14.27
/BUSAK  (via drill 0.2)
  Top 0.127: v79.38,77.27 79.38,48.77 81.5,48.77 SJ4.2 | v1,49.64 1,36.89 v1.5,36.39 | v9.62,21.52 v7.25,23.89 | v68.5,9.39 66.12,7.02 66.12,3.89 18A.1
  Bottom 0.127: v79.38,77.27 74.12,82.52 64.12,82.52 59.5,87.14 20.88,87.14 13.5,79.77 1.62,79.77 0.62,78.77 0.62,49.64 v1,49.64 | v1.5,36.39 1.5,23.89 v7.25,23.89 | v9.62,21.52 10.12,21.02 22.62,21.02 22.88,21.27 35,21.27 40,16.27 52.38,16.27 53.62,15.02 77.38,15.02 78.62,13.77 78.62,12.02 71.12,12.02 v68.5,9.39
/BUSRQ  (via drill 0.2)
  Top 0.127: v79.5,10.77 79.5,29.89 79.75,30.14 79.75,45.26 80.62,46.13 81.18,46.13 83.05,48 83.05,50.97 SJ2.2 | v73.96,9.18 72.01,9.18 71.12,8.3 71.12,3.89 20A.1
  Bottom 0.127: v79.5,10.77 79.36,10.62 75.4,10.62 v73.96,9.18
/BUSRQ'  (via drill 0.2)
  Top 0.127: U6.P75 66.5,49.52 66.62,49.64 v66.62,57.14 v66.62,57.15 | v81.35,55.05 81.69,54.71 SJ2.1
  Bottom 0.127: v81.35,55.05 81.11,55.29 80.77,55.29 78.91,57.15 v66.62,57.15
/CLOCK  (via drill 0.2)
  Top 0.127: v61.38,23.52 61.38,27.14 U6.P24 | v42.38,21.02 41.58,20.23 v41.58,9.68
  Bottom 0.127: v61.38,23.52 61.25,23.39 53.25,23.39 50.88,21.02 v42.38,21.02 | v41.58,9.68 40.99,9.68 39.33,8.02 37.38,8.02 35.62,6.27 35.62,3.89 6B.1
/HALT  (via drill 0.2)
  Top 0.127: v71.88,23.89 71.88,33.64 69.88,33.64 U6.P45 | v65.88,23.02 65.75,22.89 65.75,15.89 66.38,15.27 66.38,11.52 v66.5,11.39 | v54.12,11.14 53.84,10.85 R7.2
  Bottom 0.127: v71.88,23.89 71,23.02 v65.88,23.02 | v66.5,11.39 66.25,11.14 v54.12,11.14
/HALT'
  Top 0.127: R7.1 53.34,8.65 13A.1
/IORQ  (via drill 0.2)
  Top 0.127: v68.5,36.64 69.75,36.64 U6.P51 | v77.88,36.89 78.38,36.39 78.38,17.64 78.12,17.39 78.12,15.27 77.38,14.52 v77.38,14.27 | v73.88,13.77 72.38,13.77 72.38,14.02 IC3.14
  Bottom 0.127: v68.5,36.64 68.75,36.89 v77.88,36.89 | v77.38,14.27 76.88,13.77 v73.88,13.77
/IORQ_5  (via drill 0.2)
  Top 0.127: v63.75,13.52 63.75,15.27 62.38,15.27 IC3.6 | v59.62,13.14 58.5,12.02 58.5,3.89 15A.1 | U6.P143 46.42,30.09 46.22,29.89 46.22,28.97 47.43,27.76 47.58,27.76 47.87,27.47 47.87,27.06 47.74,26.94 v47.74,12.38
  Bottom 0.127: v63.75,13.52 63.38,13.14 v59.62,13.14 59.37,12.88 55.3,12.88 54.8,12.38 v47.74,12.38
/M1  (via drill 0.2)
  Top 0.127: v70.88,47.77 70.88,44.64 69.88,44.64 U6.P67 | v76.12,47.52 76.12,43.02 76,42.89 76,41.89 76.38,41.52 76.38,28.27 75.25,27.14 75.25,24.89 75.38,24.77 75.38,19.75 74.9,19.27 74.86,19.27 74.48,18.9 74.48,18.84 74.02,18.38 73.8,18.38 73.32,17.91 IC3.17
  Bottom 0.127: v70.88,47.77 71.12,47.52 v76.12,47.52
/M1_5  (via drill 0.2)
  Top 0.127: v64.12,19.14 62.38,19.14 IC3.3 | v70.12,18.77 70.62,18.27 70.62,9.69 v70.38,9.69 | v75.9,8.35 75.9,8.01 76.12,7.79 76.12,3.89 22A.1
  Bottom 0.127: v64.12,19.14 64.5,18.77 v70.12,18.77 | v75.9,8.35 75.73,8.52 73.88,8.52 73.22,9.18 71.45,9.18 70.89,9.18 v70.38,9.69
/MEM_OE  (via drill 0.2)
  Top 0.127: 29.25,55.02 29.62,55.39 29.62,72.77 29.25,73.14 U2.24 | 29.25,55.02 28.5,54.27 28.5,47.14 U3.67 | v57.88,52.14 57.88,49.52 U6.P92 | 29.25,55.02 v29.62,54.64
  Bottom 0.127: v57.88,52.14 57,53.02 46.25,53.02 46.12,53.14 40.38,53.14 38.88,54.64 v29.62,54.64
/MREQ  (via drill 0.2)
  Top 0.127: v68,33.14 68.75,33.89 68.75,34.52 69.75,34.52 U6.P47 | v65.75,30.64 v65.75,32.89 | v67.63,30.58 67.73,30.58 68.12,30.18 68.12,22.3 69.12,21.3 v69.12,12.89 | v73.88,12.77 72.38,12.77 IC3.13
  Bottom 0.127: v68,33.14 67.75,32.89 v65.75,32.89 | v65.75,30.64 65.81,30.58 v67.63,30.58 | v69.12,12.89 69.25,12.77 v73.88,12.77
/MREQ_5
  Top 0.127: IC3.7 62.25,14.14 61,14.14 61,15.77 61.25,16.02 63.5,16.02 63.5,17.14 63.38,17.27 61.25,17.27 60.12,18.39 57.75,18.39 57.75,17.14 56,15.39 56,3.89 14A.1
/OE_OL  (via drill 0.2)
  Top 0.127: v55.75,47.77 55.5,47.52 55.5,27.27 U6.P12 | U3.77 22.58,45.02 22.05,45.02 21.41,45.66 v21.41,49.76
  Bottom 0.127: v55.75,47.77 58.62,47.77 58.88,47.52 60.88,47.52 60.88,48.27 60,49.14 45.12,49.14 45,49.02 41.5,49.02 40.57,49.94 v38.84,49.94 v38.83,49.95 34.22,49.95 34.09,50.08 33.69,50.08 33.13,49.52 24.42,49.52 24.18,49.76 v21.41,49.76
/RD  (via drill 0.2)
  Top 0.127: v51.38,56.02 51.38,49.52 U6.P105 | v35.12,56.39 34.1,55.37 34.1,49.79 v33.89,49.58 | v13.62,23.52 14.12,23.02 v14.12,17.27 | v73.88,14.52 73.62,14.52 72.88,15.27 72.38,15.27 IC3.15
  Bottom 0.127: v51.38,56.02 50.88,56.52 38.88,56.52 38.62,56.27 35.25,56.27 v35.12,56.39 | v33.89,49.58 33.57,49.27 12.12,49.27 4,41.14 4,31.02 3.38,31.02 3.12,30.77 3.12,30.02 6.25,30.02 12.75,23.52 v13.62,23.52 | v14.12,17.27 16.12,15.27 53,15.27 53.62,14.64 73.75,14.64 v73.88,14.52
/RD_5
  Top 0.127: IC3.5 62.25,16.64 61.12,16.64 61.12,17.02 60.88,17.27 60.12,17.27 60.12,4.64 60.88,3.89 16A.1
/RESET  (via drill 0.2)
  Top 0.127: 21A.1 73.66,7.36 v72.46,8.55 | v20.48,10.01 16.69,13.8 16.23,13.8 12.63,17.4 12.63,25.93 12.38,26.18 12.38,29.14 12.49,29.25 13.35,29.25 14.75,30.65 14.75,30.66 v14.75,35.51 | v21.63,35.51 22.59,35.51 U3.96
  Bottom 0.127: v72.46,8.55 71.7,8.55 71.61,8.64 66.41,8.64 65.76,9.29 48.96,9.29 48.49,9.76 43.8,9.76 43.65,9.61 42.35,9.61 41.72,10.24 22.76,10.24 22.47,10.54 22.06,10.54 21.53,10.01 v20.48,10.01 | v14.75,35.51 v21.63,35.51
/RESET_FPGA  (via drill 0.2)
  Top 0.127: v23.88,32.77 23.88,35.27 23.5,35.64 23.5,35.77 22.75,35.77 U3.95 | v41.32,32.52 42.88,30.96 v42.88,29.64 | v48.25,28.89 48.75,29.39 48.75,31.27 48.5,31.52 47.75,31.52 U6.P140
  Bottom 0.127: v23.88,32.77 24.12,32.52 v41.32,32.52 | v42.88,29.64 43.12,29.39 47.75,29.39 v48.25,28.89
/RFSH  (via drill 0.2)
  Top 0.127: v67.88,35.02 66.62,36.27 66.62,46.39 66.88,46.64 66.88,49.39 U6.P74 | v74.88,34.14 75.38,33.64 v75.38,28.39 | IC3.18 73.86,19.18 v73.99,19.05
  Bottom 0.127: v67.88,35.02 68.75,34.14 v74.88,34.14 | v75.38,28.39 76.25,27.52 78,27.52 80.49,25.03 80.49,23.67 79.88,23.06 79.88,19.05 v73.99,19.05
/RFSH_5  (via drill 0.2)
  Top 0.127: 23A.1 78.74,9.31 79.99,10.56 79.99,10.97 79.75,11.21 79.75,23.88 v79.99,23.88 | v63.7,20.89 63.26,20.45 IC3.2
  Bottom 0.127: v79.99,23.88 75.96,23.88 75.08,24.76 74.45,24.76 70.18,20.49 64.92,20.49 64.1,20.49 v63.7,20.89
/WAIT  (via drill 0.2)
  Top 0.127: v36.88,20.14 34.62,22.39 34.62,28.77 35.38,29.52 35.38,31.52 U3.23 | v69.38,9.52 68.62,8.77 68.62,3.89 19A.1
  Bottom 0.127: v36.88,20.14 40.38,16.64 52.38,16.64 53.62,15.39 78.38,15.39 80.5,13.27 80.5,11.27 79,11.27 78.86,11.12 70.98,11.12 v69.38,9.52
/WR  (via drill 0.2)
  Top 0.127: v71.25,39.89 71.25,40.02 69.88,40.02 U6.P58 | v74.25,39.39 74.38,39.27 74.38,23.02 74.62,22.77 v74.62,20.52 | v74,17.89 72.75,16.64 72.38,16.64 IC3.16
  Bottom 0.127: v71.25,39.89 71.75,39.39 v74.25,39.39 | v74.62,20.52 74.37,20.26 74.37,20.19 73.15,18.97 73.15,18.48 73.75,17.89 v74,17.89
/WR'  (via drill 0.2)
  Top 0.127: v36.07,23.8 38.12,25.86 38.12,33.27 U3.26 | v15.12,18.64 15.72,19.23 15.72,20.93 v16.31,21.52 | v5.5,18.14 4.75,18.89 4.75,25.77 4.88,25.89 4.88,38.52 4.62,38.77 4.62,41.02 v4.75,41.14 | v22.75,47.77 23.12,48.14 v23.12,55.77 | v31.38,55.89 32.12,56.64 v32.12,65.77 | v22.88,68.77 22.88,73.14 U2.29 | v53.81,59.95 53.21,59.35 53.21,58.55 53.62,58.14 53.62,53.77 53.12,53.27 53.12,49.64 53,49.52 U6.P102 | v46.38,64.64 v50.38,60.64
  Bottom 0.127: v36.07,23.8 35.95,23.8 35.78,23.64 21.12,23.64 19,21.52 v16.31,21.52 | v15.12,18.64 11.48,18.64 10.98,18.14 v5.5,18.14 | v4.75,41.14 11.38,47.77 v22.75,47.77 | v23.12,55.77 23.25,55.89 v31.38,55.89 | v22.88,68.77 29.12,68.77 v32.12,65.77 33.75,65.77 34.62,64.89 46.12,64.89 v46.38,64.64 | v53.81,59.95 53.12,60.64 v50.38,60.64
/WR_5
  Top 0.127: IC3.4 62.38,17.89 63.88,17.89 63.88,15.52 64.25,15.14 64.25,4.64 63.5,3.89 17A.1
A0  (via drill 0.2)
  Top 0.127: v64.12,28.64 64.38,28.39 64.38,27.27 U6.P30 | v42.88,26.89 42.88,10.73 42.43,10.28 42.43,8.93 v42.01,8.5
  Bottom 0.127: v64.12,28.64 62.25,26.77 43,26.77 v42.88,26.89 | v42.01,8.5 41.75,8.77 40.62,8.77 38.12,6.27 38.12,3.89 7B.1
A0'  (via drill 0.2)
  Top 0.127: v21.37,36.2 20.99,35.83 20.99,34.89 22.62,34.89 U3.97 | v20.01,36.66 19.88,36.79 19.88,44.77 19.75,44.89 19.75,53.89 19.88,54.02 19.88,56.39 v19.75,56.52 | U2.12 33,60.02 v33,57.14 v33,55.14 | v62.38,54.39 62.38,49.52 U6.P83
  Bottom 0.127: v20.01,36.66 20.01,36.61 20.41,36.2 v21.37,36.2 | v19.75,56.52 20.38,57.14 v33,57.14 | v62.38,54.39 61.62,55.14 v33,55.14
A1  (via drill 0.2)
  Top 0.127: v64,24.14 65.88,26.02 65.88,27.14 U6.P33 | v41.12,24.27 41,24.14 41,8.39 v41.12,8.27
  Bottom 0.127: v64,24.14 63.75,24.39 52.25,24.39 52.12,24.27 v41.12,24.27 | v41.12,8.27 41.12,3.89 40.75,3.89 8B.1
A1'  (via drill 0.2)
  Top 0.127: v21.5,34.39 22.62,34.39 U3.98 | v19.69,34.49 19.5,34.68 19.5,44.27 19.38,44.39 19.38,53.89 19.5,54.02 19.5,55.27 v19.38,55.39 | v31.38,56.64 31.62,56.89 31.62,60.02 U2.11 | v61.88,48.02 61.88,49.39 U6.P84 | v47.38,49.64 46.75,50.27 v46.75,55.64
  Bottom 0.127: v21.5,34.39 19.77,34.39 19.69,34.47 v19.69,34.49 | v19.38,55.39 20.62,56.64 v31.38,56.64 32.25,56.64 33.38,55.52 46.62,55.52 v46.75,55.64 | v61.88,48.02 60.25,49.64 v47.38,49.64
A2  (via drill 0.2)
  Top 0.127: v66.12,10.64 66,10.77 66,15.02 65.38,15.64 65.38,23.27 66.88,24.77 66.88,27.14 U6.P35 | v44.5,5.14 v44.5,10.77
  Bottom 0.127: v66.12,10.64 65.88,10.39 53.38,10.39 53,10.02 50.23,10.02 49.56,10.69 44.58,10.69 v44.5,10.77 | v44.5,5.14 43.25,3.89 9B.1
A2'  (via drill 0.2)
  Top 0.127: v23.62,31.52 24.38,31.52 U3.1 | v17.75,31.52 16.25,33.02 16.25,45.39 16.12,45.52 16.12,52.39 v16.62,52.89 | v26.12,52.27 26.12,53.89 26.38,54.14 28,54.14 v28,53.64 | v29,53.64 29.5,54.14 30.25,54.14 | 30.25,54.14 30.25,59.89 30.38,60.02 U2.10 | v61.62,50.77 61.62,49.64 61.5,49.52 U6.P85 | v48.5,50.14 47.88,50.77 v47.88,51.39 | 30.25,54.14 v30.25,52.27
  Bottom 0.127: v17.75,31.52 v23.62,31.52 | v16.62,52.89 17.5,52.02 25.88,52.02 v26.12,52.27 | v29,53.64 v28,53.64 | v61.62,50.77 61,50.14 v48.5,50.14 | v47.88,51.39 44.67,51.39 44.55,51.52 40.5,51.52 40.38,51.39 39.62,51.39 38.62,52.39 30.38,52.39 v30.25,52.27
A3  (via drill 0.2)
  Top 0.127: v68.64,22.51 68.5,22.65 68.5,31.02 69.75,31.02 U6.P40 | v67.22,21.61 66.88,21.27 v66.88,14.14 | v46.62,8.27 v46.62,14.27
  Bottom 0.127: v68.64,22.51 67.74,21.61 v67.22,21.61 | v66.88,14.14 66.75,14.27 v46.62,14.27 | v46.62,8.27 46.62,5.52 45.75,4.64 45.75,3.89 10B.1
A3'  (via drill 0.2)
  Top 0.127: v24.89,34.89 24.89,34.83 24.91,34.81 24.91,31.63 U3.2 | v18.91,36.76 18.5,37.17 18.5,56.64 18.25,56.89 v18.25,61.52 | v29.12,62.27 29.12,60.14 U2.9 | v59.88,50.77 59.88,49.52 U6.P88 | v39.25,51.02 38.88,51.39 38.88,61.77 v38.38,62.27
  Bottom 0.127: v18.91,36.76 19.32,37.16 20.34,37.16 20.81,36.7 21.57,36.7 23.38,34.89 v24.89,34.89 | v18.25,61.52 19,62.27 v29.12,62.27 v38.38,62.27 | v59.88,50.77 59.75,50.64 47.88,50.64 47.5,51.02 44.66,51.02 44.53,51.14 40.5,51.14 40.38,51.02 v39.25,51.02
A4  (via drill 0.2)
  Top 0.127: v52.12,29.14 52.12,27.39 52,27.27 U6.P5 | v79.25,30.39 79.12,30.27 79.12,11.14 77.5,9.52 v77.5,5.14
  Bottom 0.127: v52.12,29.14 53,30.02 67.32,30.02 67.36,29.98 78.84,29.98 v79.25,30.39 | v77.5,5.14 76.25,3.89 22B.1
A4'  (via drill 0.2)
  Top 0.127: v24.38,35.96 24.54,35.96 25.39,35.1 25.39,31.64 U3.3 | v19,54.27 v19,38.14 | v25.99,54.99 25.99,56.52 27.87,58.4 U2.8 v27.88,61.77 | v57.62,46.27 57.62,49.27 57.5,49.39 U6.P93 | v45.04,46.39 44.75,46.68 v44.75,61.89
  Bottom 0.127: v24.38,35.96 21.87,38.46 19.32,38.46 v19,38.14 | v19,54.27 19.73,54.99 v25.99,54.99 | v57.62,46.27 51,46.27 50.75,46.52 45.34,46.52 45.21,46.39 v45.04,46.39 | v44.75,61.89 44.62,61.77 v27.88,61.77
A5  (via drill 0.2)
  Top 0.127: v67.62,44.14 69.75,44.14 U6.P66 | v58.5,44.27 56.5,42.27 56.5,39.89 56,39.39 v56,31.27 | v43.88,31.27 43.38,30.77 43.38,10.86 44,10.23 v44,9.27
  Bottom 0.127: v67.62,44.14 67.5,44.27 v58.5,44.27 | v43.88,31.27 v56,31.27 | v44,9.27 44.12,9.39 48.5,9.39 48.86,9.03 65.65,9.03 66.3,8.39 71.5,8.39 73.62,6.27 73.62,3.89 21B.1
A5'  (via drill 0.2)
  Top 0.127: U3.4 26.12,31.77 26.12,32.39 28.16,34.42 29.12,34.42 29.12,43.27 v27.5,44.89 | v21.12,45.14 20.75,45.52 20.75,52.52 | v20.75,61.77 20.75,52.52 | v26.12,61.77 26.5,61.39 26.5,60.14 U2.7 | v56.38,51.14 56.38,49.52 U6.P95 | 20.75,52.52 v21.75,52.52
  Bottom 0.127: v27.5,44.89 27.38,44.77 22.77,44.77 21.5,44.77 v21.12,45.14 | v26.12,61.77 v20.75,61.77 | v56.38,51.14 55.5,52.02 50.62,52.02 50.38,52.27 45.62,52.27 45.5,52.39 39,52.39 38.62,52.77 24.88,52.77 24.62,52.52 v21.75,52.52
A6  (via drill 0.2)
  Top 0.127: v67.88,31.64 69.75,31.64 U6.P41 | v44.5,30.77 43.75,30.02 43.75,12.27 45.25,10.77 v45.25,8.89 | 48.25,8.14 v47.62,8.77 | 48.25,8.14 48.25,3.89 11A.1 | v52.76,8.52 52.75,8.53 v52.75,10.52 | 48.25,8.14 v50.62,10.52
  Bottom 0.127: v67.88,31.64 67.75,31.52 58.38,31.52 57.62,30.77 v44.5,30.77 | v45.25,8.89 45.38,8.77 v47.62,8.77 | v52.76,8.52 53,8.77 65.5,8.77 66.17,8.1 71,8.1 71,3.89 20B.1 | v50.62,10.52 v52.75,10.52
A6'  (via drill 0.2)
  Top 0.127: v24.75,29.27 26.38,30.89 26.38,31.52 U3.5 | v10.88,33.39 11.15,33.66 11.15,34.66 10.99,34.82 10.99,36.83 11.15,36.99 v11.15,49.58 | v24.5,50.14 24.88,50.52 24.88,53.14 | 24.88,53.14 24.88,59.64 25.25,60.02 U2.6 | v54.5,52.52 54.5,49.52 U6.P99 | 24.88,53.14 v24.5,53.14
  Bottom 0.127: v24.75,29.27 24.5,29.52 19.81,29.52 18.56,30.76 16.44,30.76 16.2,30.52 15.8,30.52 15.59,30.73 14.47,30.73 14.26,30.52 13.75,30.52 v10.88,33.39 | v11.15,49.58 11.15,50.01 11.48,50.34 24.3,50.34 v24.5,50.14 | v54.5,52.52 54.38,52.64 46.25,52.64 46.12,52.77 39,52.77 38.62,53.14 v24.5,53.14
A7  (via drill 0.2)
  Top 0.127: v68.5,42.39 68.5,42.14 69.75,42.14 U6.P62 | v73,42.39 73.25,42.14 73.25,24.64 v73.38,24.52 | v68.27,21.41 68.62,21.05 68.62,11.02 69.88,9.77 v69.88,5.14
  Bottom 0.127: v73,42.39 v68.5,42.39 | v73.38,24.52 70.27,21.41 v68.27,21.41 | v69.88,5.14 68.62,3.89 19B.1
A7'  (via drill 0.2)
  Top 0.127: 36.4,39.39 36.38,39.39 v36.38,40.52 | 36.4,39.39 38.12,39.39 U3.38 | v53.5,40.39 53.5,47.39 53.62,47.52 53.62,49.27 53.5,49.39 U6.P101 | v24,46.02 24,60.02 U2.5 | v32.38,44.89 33.09,44.17 33.09,42.79 33.25,42.63 33.25,40.28 33,40.03 33,38.89 33.66,38.23 35.63,38.23 35.97,38.57 35.97,38.96 36.4,39.39
  Bottom 0.127: v36.38,40.52 36.5,40.39 48.62,40.39 48.75,40.52 51.62,40.52 51.75,40.39 v53.5,40.39 | v24,46.02 24.25,46.27 31,46.27 v32.38,44.89
A8  (via drill 0.2)
  Top 0.127: v52.62,32.27 52.62,27.39 52.5,27.27 U6.P6 | v77.79,30.54 77.79,27.05 v77.75,27.02 | v64.5,21.7 64.62,21.58 64.62,15.52 65.25,14.89 v65.25,8.27
  Bottom 0.127: v52.62,32.27 59.88,32.27 60.25,31.89 67.38,31.89 67.62,32.14 68.12,32.14 68.25,32.02 70.88,32.02 71,32.14 76.19,32.14 v77.79,30.54 | v77.75,27.02 77.12,26.39 64.75,26.39 64.5,26.14 v64.5,21.7 | v65.25,8.27 65.25,3.89 66,3.89 18B.1
A8'  (via drill 0.2)
  Top 0.127: v42.75,43.52 42.75,39.89 38.25,39.89 U3.39 | v55,43.64 55,49.39 U6.P98 55,49.52 55,53.02 v54.5,53.52 | v26,71.64 26,72.52 25.38,73.14 U2.27 | v43.12,71.52 45.75,68.89 v45.75,54.64
  Bottom 0.127: v42.75,43.52 42.88,43.39 44.75,43.39 45,43.64 v55,43.64 | v26,71.64 26.12,71.52 v43.12,71.52 | v45.75,54.64 46.88,53.52 v54.5,53.52
A9  (via drill 0.2)
  Top 0.127: v68.5,39.89 68.5,40.52 69.75,40.52 U6.P59 | v76.88,37.39 77,37.27 77,36.27 77.38,35.89 77.38,31.2 77.25,31.07 77.25,22.02 v76.38,21.14 | v64.12,18.39 64.25,18.27 64.25,15.52 64.75,15.02 v64.75,5.14
  Bottom 0.127: v68.5,39.89 69.5,38.89 75.38,38.89 v76.88,37.39 | v76.38,21.14 76.25,21.02 73.12,21.02 70.38,18.27 66.62,18.27 66.5,18.39 v64.12,18.39 | v64.75,5.14 63.5,3.89 17B.1
A9'  (via drill 0.2)
  Top 0.127: v40.12,51.89 40.25,51.77 40.25,47.52 40.12,47.39 40.12,44.64 40.38,44.39 40.38,40.39 38.25,40.39 U3.40 | v55.5,51.14 55.5,49.52 U6.P97 | v26.62,71.02 26.62,73.14 U2.26 | v44,67.14 45.25,65.89 v45.25,51.89
  Bottom 0.127: v40.12,51.89 v45.25,51.89 50.38,51.89 51.12,51.14 v55.5,51.14 | v26.62,71.02 27.5,70.14 41,70.14 v44,67.14
A10  (via drill 0.2)
  Top 0.127: v71.62,40.89 71.75,40.77 71.75,39.39 71,39.39 70.88,39.52 69.88,39.52 U6.P57 | v78,40.89 78.75,40.14 78.75,17.27 v78.62,17.14 | v59.62,15.89 58,14.27 v58,8.27
  Bottom 0.127: v78,40.89 v71.62,40.89 | v78.62,17.14 77.38,15.89 v59.62,15.89 | v58,8.27 58.25,8.02 59.25,8.02 60.88,6.39 60.88,3.89 16B.1
A10'  (via drill 0.2)
  Top 0.127: 39.88,48.93 39.88,51.39 39.25,52.02 39.25,73.64 37.38,75.52 32.12,75.52 32.12,71.89 32,71.77 30.5,71.77 30.5,73.14 U2.23 | 39.88,48.93 39.88,47.52 39.75,47.39 39.75,44.64 40,44.39 40,40.89 38.25,40.89 U3.41 | v60.38,48.02 60.38,49.39 U6.P87 | 39.88,48.93 v39.59,48.93
  Bottom 0.127: v60.38,48.02 60.12,48.27 46.12,48.27 45.62,48.77 45.12,48.77 45,48.64 39.88,48.64 v39.59,48.93
A11  (via drill 0.2)
  Top 0.127: v67.12,37.64 67.12,38.52 69.75,38.52 U6.P55 | v52.5,37.39 52.12,37.02 v52.12,30.27 | v49.5,29.27 48.38,28.14 48.38,13.52 51.35,10.54 v51.35,8.37
  Bottom 0.127: v67.12,37.64 66.88,37.39 v52.5,37.39 | v52.12,30.27 51.12,29.27 v49.5,29.27 | v51.35,8.37 51.71,8.02 56.62,8.02 58.38,6.27 58.38,3.89 15B.1
A11'  (via drill 0.2)
  Top 0.127: v39.5,43.14 39.5,41.39 38.25,41.39 U3.42 | v42,43.52 42.25,43.77 v42.25,47.27 42.25,50.52 41.75,51.02 41.75,62.89 41.62,63.02 41.62,74.39 v40.25,75.77 | v57,47.27 57,49.39 U6.P94 | v28.12,75.02 28.12,73.52 27.88,73.27 U2.25
  Bottom 0.127: v39.5,43.14 40,43.64 41.88,43.64 v42,43.52 | v28.12,75.02 28.88,75.77 v40.25,75.77 | v42.25,47.27 42.78,47.27 43.27,47.76 44.56,47.76 45.04,47.27 v56.99,47.27 v57,47.27
A12  (via drill 0.2)
  Top 0.127: v67.12,28.64 67.12,33.02 68.38,34.27 68.38,35.02 69.75,35.02 U6.P48 | v69,24.52 v69,26.89 | v67.25,23.52 66.25,22.52 v66.25,17.89 | v59.25,17.89 57.12,15.77 v57.12,5.02
  Bottom 0.127: v67.12,28.64 68.88,26.89 v69,26.89 | v69,24.52 68,23.52 v67.25,23.52 | v59.25,17.89 v66.25,17.89 | v57.12,5.02 56,3.89 14B.1
A12'  (via drill 0.2)
  Top 0.127: v37.12,40.89 37.12,41.77 38.12,41.77 U3.43 | v52,40.89 v52,46.77 52,49.39 U6.P104 | v23.5,46.64 23.62,46.77 23.62,56.02 23.5,56.14 23.5,59.39 22.88,60.02 U2.4
  Bottom 0.127: v52,40.89 v37.12,40.89 | v23.5,46.64 23.62,46.77 42.64,46.77 43.1,47.22 43.76,47.22 44.04,47.5 44.45,47.5 45.07,46.88 46.52,46.88 46.6,46.8 51.96,46.8 v52,46.77
A13  (via drill 0.2)
  Top 0.127: v72.38,27.64 72.38,34.02 69.88,34.02 U6.P46 | v70.5,26.89 69.62,26.02 v69.62,14.14 | v55.5,12.39 54.62,11.52 v54.62,5.14
  Bottom 0.127: v72.38,27.64 71.62,26.89 v70.5,26.89 | v69.62,14.14 67.88,12.39 v55.5,12.39 | v54.62,5.14 53.38,3.89 13B.1
A13'  (via drill 0.2)
  Top 0.127: v54,41.39 54,49.39 U6.P100 54,49.52 54,58.63 v53.81,58.82 | U3.44 38.12,42.27 36.5,42.27 36.5,41.48 36.47,41.45 v36.47,41.27 | v26,58.64 26,61.14 24.88,62.27 24.88,72.39 24.12,73.14 U2.28
  Bottom 0.127: v26,58.64 26.25,58.89 50.5,58.89 50.64,58.75 53.76,58.75 v53.82,58.81 v53.81,58.82 | v36.47,41.27 v36.47,41.28 36.57,41.38 36.58,41.39 v54,41.39
A14  (via drill 0.2)
  Top 0.127: v71.38,33.14 69.88,33.14 U6.P44 | v74.88,24.27 v74.88,33.14 | v57.25,17.89 52.12,12.77 v52.12,5.14
  Bottom 0.127: v74.88,33.14 v71.38,33.14 | v74.88,24.27 71.25,20.64 71.25,19.64 59,19.64 v57.25,17.89 | v52.12,5.14 50.88,3.89 12B.1
A14'  (via drill 0.2)
  Top 0.127: v45.12,42.64 45.38,42.89 45.38,45.64 46,46.27 46.62,46.27 46.75,46.14 47.62,46.14 U6.P111 | U3.45 38.12,42.77 v36.62,42.77 36.37,42.77 35.86,43.27 35.86,45.23 37.12,46.49 37.12,50.76 36.5,51.38 v36.5,54.14 | v21.25,54.39 21.25,59.77 21.5,60.02 U2.3
  Bottom 0.127: v36.62,42.77 36.75,42.64 v45.12,42.64 | v21.25,54.39 21.5,54.14 v36.5,54.14
A15  (via drill 0.2)
  Top 0.127: v71.25,31.64 71.25,32.52 69.88,32.52 U6.P43 | v61.44,29.01 61.53,29.01 61.88,29.35 v61.88,30.52 | v47.38,27.27 47.12,27.02 47.12,5.27 v47,5.14
  Bottom 0.127: v71.25,31.64 70.75,31.14 62.5,31.14 v61.88,30.52 | v61.44,29.01 61.11,29.01 59.36,27.27 v47.38,27.27 | v47,5.14 48.25,3.89 11B.1
A15'  (via drill 0.2)
  Top 0.127: v37.12,43.39 38.12,43.39 U3.46 | v43.5,43.89 43.62,44.02 v43.62,45.64 43.16,46.11 43.16,56.03 43.17,56.05 43.17,56.66 43,56.83 43,57.24 43.21,57.45 43.21,62.68 v43.12,62.77 | v46.25,45.77 46.62,45.77 46.75,45.64 47.62,45.64 U6.P112 | v21.25,63.89 21.25,66.27 21,66.52 21,72.39 20.25,73.14 U2.31
  Bottom 0.127: v37.12,43.39 37.75,44.02 43.38,44.02 v43.5,43.89 | v43.62,45.64 43.75,45.77 v46.25,45.77 | v21.25,63.89 22.38,62.77 v43.12,62.77
A16'  (via drill 0.2)
  Top 0.127: v36.42,44.57 36.42,44.27 38.12,44.27 U3.48 | v46.25,44.39 46.62,44.39 46.75,44.52 47.62,44.52 U6.P114 | v20.25,45.14 20.25,60.02 U2.2
  Bottom 0.127: v46.25,44.39 36.59,44.39 v36.42,44.57 36.25,44.74 33.1,44.74 32.75,44.39 21,44.39 v20.25,45.14
A17'  (via drill 0.2)
  Top 0.127: U3.51 36.62,47.27 v36.62,50.52 | v38,51.89 37.88,52.02 37.88,57.52 38.5,58.14 38.5,61.39 v36.25,63.64 36.25,65.02 v37.5,66.27 | v22.25,63.64 21.62,64.27 21.62,73.14 U2.30 | v68.5,41.39 68.5,41.52 69.75,41.52 U6.P61 | v78.88,58.58 79.12,58.34 79.12,51.31 78,50.19 v78,43.39
  Bottom 0.127: v38,51.89 v36.62,50.52 | v22.25,63.64 v36.25,63.64 | v68.5,41.39 68.62,41.52 76.12,41.52 v78,43.39 | v37.5,66.27 39,66.27 39.62,65.64 67.25,65.64 73,59.89 73.38,59.89 74.26,59.01 74.58,59.01 75,58.58 v78.88,58.58
A18'  (via drill 0.2)
  Top 0.127: v36,57.02 36,48.27 | 36,48.27 36,47.14 U3.52 | v19,58.14 19,60.02 U2.1 | 36,48.27 v36.12,48.27 | U6.P115 47.62,44.02 46.62,44.02 46.25,43.64 45.75,43.64 45.75,42.52 45.38,42.14 44.88,42.14 44.65,42.37 44.65,42.42 44.63,42.44 44.63,42.84 44.95,43.16 44.95,43.76 45.12,43.94 45.12,45.74 45.97,46.59 45.97,47.67 v45.38,48.27
  Bottom 0.127: v36,57.02 34.88,58.14 v19,58.14 | v45.38,48.27 45.26,48.38 36.24,48.38 v36.12,48.27
B0  (via drill 0.2)
  Top 0.127: v34.62,45.27 34.62,46.89 34.5,47.02 U3.55 | v49,44.14 48.5,43.64 47.75,43.64 U6.P116